# Altium PCB test_board.PcbDoc
Units mm, origin at the board's own origin, x right, y up, seen from the top; angles counter-clockwise.
Board outline 152.4 x 101.6 mm, 2 copper layers (Top Layer, Bottom Layer); 82 components, 69 nets, 361 pads, 23 vias.
Unrouted connection lines stored in the file: 183.
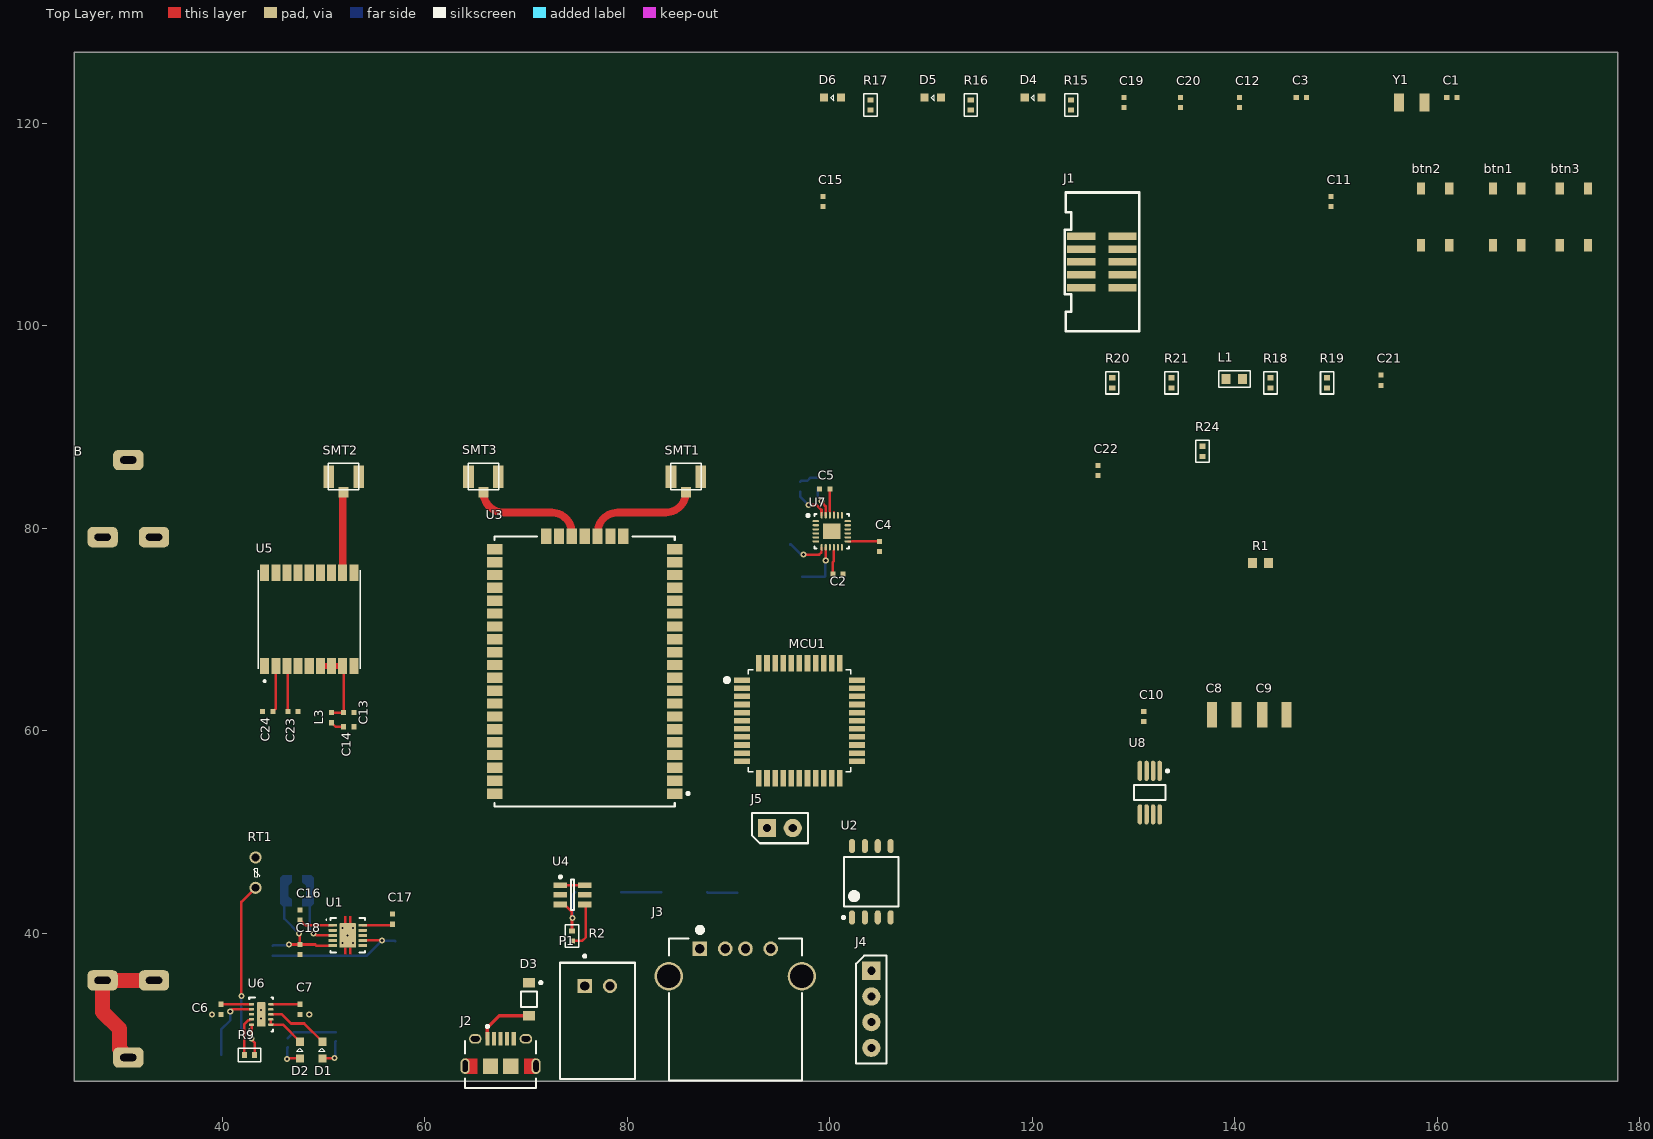
[diagram p0: Top Layer view]
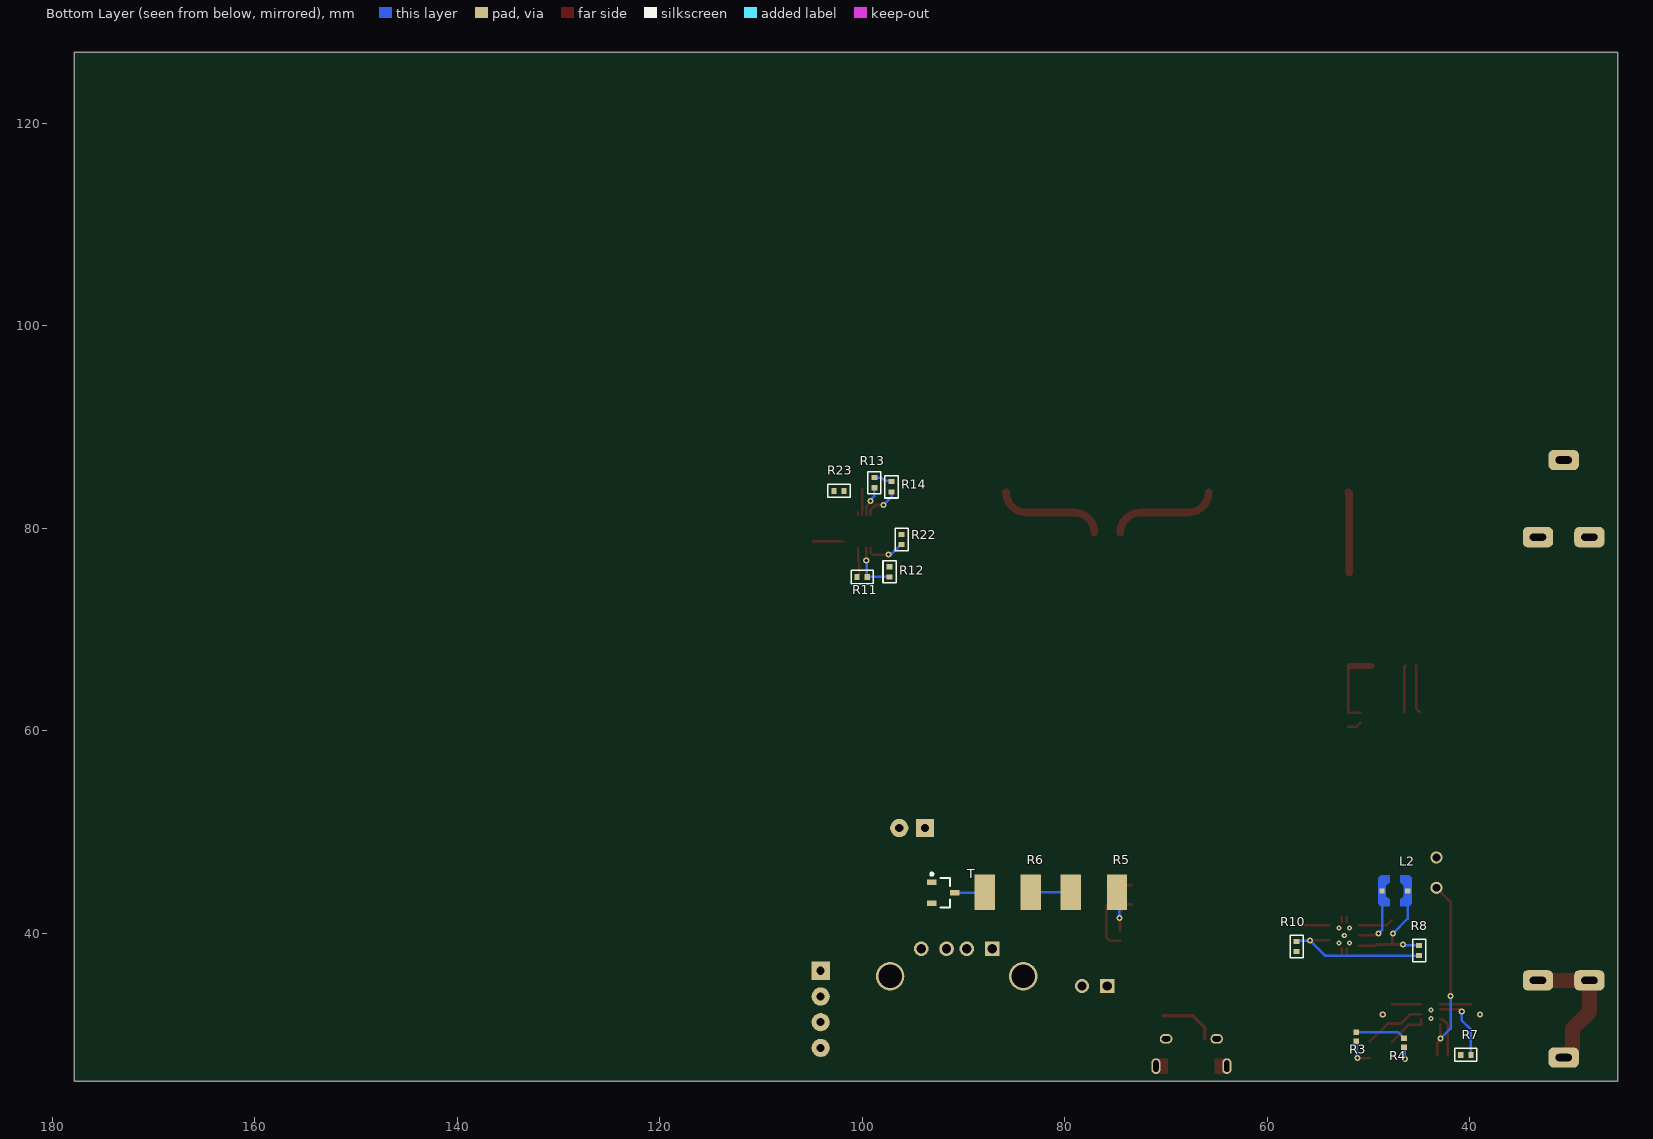
[diagram p1: Bottom Layer view, seen from below]

## Layer stack, top to bottom
Top Solder: solder mask 0.0102, Solder Resist, Dk 3.5
Top Layer: signal copper 0.0356
Dielectric 1: dielectric 0.32, FR-4, Dk 4.8
Bottom Layer: signal copper 0.0356
Bottom Solder: solder mask 0.0102, Solder Resist, Dk 3.5

## Board outline
25.4,25.4 177.8,25.4 177.8,127 25.4,127

## Design rules (kind name [scope] priority, off if disabled: settings)
Clearance [All] p1: gap=0.16 ignorepadtopadclearanceinfootprint=FALSE except(0: Arc-Text Arc-Hole Track-Text Track-Hole SMDPad-Text SMDPad-Hole THPad-Text THPad-Hole Via-Text Via-Hole Fill-Text Fill-Hole Poly-Text Poly-Hole Region-Text Region-Hole Text-Text)
ComponentClearance [All] p1: gap=0.254 collisioncheckmode=3 verticalgap=0.254 showdistances=TRUE
DiffPairsRouting [All] p1: maxlimit=0.254 minlimit=0.254 mostfreqgap=0.254 toplayer_minwidth=0.16 toplayer_maxwidth=0.381 toplayer_prefwidth=0.2 bottomlayer_minwidth=0.16 bottomlayer_maxwidth=0.381 bottomlayer_prefwidth=0.2 maxuncoupledlength=0.2
Height [All] p1: minheight=0 maxheight=200 prefheight=200
HoleSize [All] p1: absolutevalues=TRUE maxlimit=6.35 minlimit=0.3 maxpercent=80.000 minpercent=20.000
LayerPairs [All] p1: enforce=FALSE
MinimumSolderMaskSliver [All] p1: minsoldermaskwidth=0
PlaneConnect [All] p1: planeconnectstyle=Relief reliefexpansion=0.508 reliefentries=4 reliefconductorwidth=1 reliefairgap=0.254
PolygonConnect PolygonConnect_1 [IsVia] p1: connectstyle=Direct reliefconductorwidth=0.254 reliefentries=4 polygonreliefangle="90 Angle" airgapwidth=0.254
PolygonConnect [All] p2: connectstyle=Relief reliefconductorwidth=0.2 reliefentries=4 polygonreliefangle="90 Angle" airgapwidth=0.254
RoutingVias [All] p1: holewidth=0.3 width=0.6 viastyle="Through Hole" minholewidth=0.3 minwidth=0.6 maxholewidth=6.35 maxwidth=1.27
SilkToSilkClearance [All] p1: silktosilkclearance=0
SilkToSolderMaskClearance [IsPad] p1: minsilkscreentomaskgap=0.178 clearancetoexposedcopper=TRUE
SolderMaskExpansion [All] p1: expansion=0.102 istentingtop=FALSE
Width [All] p1: maxlimit=5 minlimit=0.16 preferedwidth=0.25 minimp=50.000000 maximp=50.000000 favimp=50.000000
21 further rules are at their usual default settings.

## Components (designator, comment, footprint, x,y, rotation, side; value= is the part's Value field where it differs from the comment)
B "18650" 18650 30.734,27.741 r90 top
btn1 "KSC222G LFS" "KSC222G LFS" 166.878,110.744 r0 top
btn2 "KSC222G LFS" "KSC222G LFS" 159.766,110.744 r0 top
btn3 "KSC222G LFS" "KSC222G LFS" 173.482,110.744 r0 top
C1 "04023C103KAT2A" C0402 161.417,122.555 r0 top value=22pF
C2 "04023C103KAT2A" C0402 100.8,75.5 r180 top value=0.1uF
C3 "04023C103KAT2A" C0402 146.558,122.555 r0 top value=22pF
C4 "04023C103KAT2A" C0402 104.9,78.2 r90 top value=0.1uF
C5 "04023C103KAT2A" C0402 99.5,83.9 r0 top value=0.1uF
C6 "04023C103KAT2A" C0402 39.9,32.5 r270 top value=1uF
C7 "04023C103KAT2A" C0402 47.7,32.5 r270 top value=1uF
C8 "TCJB106M016R0100" C3528 138.948,61.572 r0 top value=10uF
C9 "TCJB106M016R0100" C3528 143.901,61.572 r0 top value=10uF
C10 "04023C103KAT2A" C0402 131,61.4 r90 top value=1uF
C11 "04023C103KAT2A" C0402 149.479,112.268 r90 top value=100nF
C12 "04023C103KAT2A" C0402 140.462,122.047 r90 top value=100nF
C13 "04023C103KAT2A" C0402 52.5,61.8 r180 top value="56 pF"
C14 "04023C103KAT2A" C0402 52.5,60.4 r180 top value="10 nF"
C15 "04023C103KAT2A" C0402 99.314,112.268 r90 top value=1uF
C16 "04023C103KAT2A" C0402 47.7,41.8 r270 top value="0.47 uF"
C17 "04023C103KAT2A" C0402 56.8,41.4 r90 top value=4
C18 "04023C103KAT2A" C0402 47.7,38.4 r270 top value="0.47 uF"
C19 "04023C103KAT2A" C0402 129.032,122.047 r90 top value=0.1uF
C20 "04023C103KAT2A" C0402 134.62,122.047 r90 top value=0.1uF
C21 "04023C103KAT2A" C0402 154.432,94.615 r90 top value=100nF
C22 "04023C103KAT2A" C0402 126.5,85.7 r90 top value=100nF
C23 "04023C103KAT2A" C0402 47,61.9 r0 top value="56 pF"
C24 "04023C103KAT2A" C0402 44.5,61.9 r0 top value="56 pF"
D1 "Green LED" "LED 0603" 49.9,29.3 r270 top
D2 "Green LED" "LED 0603" 47.7,29.3 r270 top
D3 "MBR0520L" ONSC-SOD-123-2-425-04_V 70.3,33.5 r270 top
D4 "Green LED" "LED 0603" 119.253,122.555 r0 top
D5 "Green LED" "LED 0603" 109.347,122.555 r0 top
D6 "Green LED" "LED 0603" 99.441,122.555 r0 top
J1 "SHF-105-01-L-D-SM" "JTAG HEADER" 126.873,106.299 r90 top
J2 "10118194-0001LF" FCI-10118194-0001LF-5_V 67.492,28.241 r0 top
J3 "292303-1" TE-292303-1_V 90.673,37.338 r0 top
J4 "ADC 4-7" HDRV4W64P254_1X4_1016X254X900B 104.1,32.5 r0 top
J5 "Header 1x2" HDRV2W64P254_1X2_508X254X900B 96.34,50.4 r90 top
L1 "MLZ1608A2R2WT" "Inductor 0603" 139.954,94.742 r0 top value=10uH
L2 "LPS3015-222MRB" COIL-LPS3015_V 47.4,44.2 r0 bottom
L3 "LQG15HN27NJ02D" "INDUCTOR 0402" 50.8,61.3 r270 top value="27 nH"
MCU1 "ATMEGA324PB-AU" *QFP80P1200X1200X120-44N 97,61 r0 top
P1 "S2B-XH-A(LF)(SN)" JST-S2B-XH-A(LF)(SN)_V 77.05,34.8 r0 top
R1 "10k" RESC0603(1608)_N 142.532,76.581 r0 top
R2 "CRCW04020000Z0ED" R0402 74.544,39.751 r270 top value="0.13 ohm"
R3 "2k" RESC0402(1005)_L 51.2,29.8 r90 bottom
R4 "2k" RESC0402(1005)_L 46.5,29.2 r90 bottom
R5 "35228R2JT" R6432 77.1,44 r0 bottom value=8.2ohm
R6 "35228R2JT" R6432 85.6,44 r0 bottom value=8.2ohm
R7 "CRCW04020000Z0ED" R0402 40.4,28 r0 bottom value=1.18kOhm
R8 "CRCW04020000Z0ED" R0402 45,38.3 r270 bottom value=2.26Mohm
R9 "CRCW04020000Z0ED" R0402 42.7,28 r0 top value=17.4kohm
R10 "CRCW04020000Z0ED" R0402 57.1,38.7 r270 bottom value=249kohm
R11 "CRCW04020000Z0ED" R0402 100,75.2 r180 bottom value=165kohm
R12 "CRCW04020000Z0ED" R0402 97.3,75.7 r90 bottom value=200kohm
R13 "CRCW04020000Z0ED" R0402 98.8,84.5 r270 bottom value=10kohm
R14 "CRCW04020000Z0ED" R0402 97.1,84.1 r270 bottom value=10kohm
R15 "CRCW04020000Z0ED" R0402 123.825,121.793 r90 top value=300
R16 "CRCW04020000Z0ED" R0402 113.919,121.793 r90 top value=300
R17 "CRCW04020000Z0ED" R0402 104.013,121.793 r90 top value=300
R18 "CRCW04020000Z0ED" R0402 143.51,94.361 r90 top value="? kohm"
R19 "CRCW04020000Z0ED" R0402 149.098,94.361 r90 top value=41.2kohm
R20 "CRCW04020000Z0ED" R0402 127.889,94.361 r90 top value="? kohm"
R21 "CRCW04020000Z0ED" R0402 133.731,94.361 r90 top value=150kohm
R22 "CRCW04020000Z0ED" R0402 96.1,78.9 r90 bottom value=10kohm
R23 "CRCW04020000Z0ED" R0402 102.3,83.7 r0 bottom value=10kohm
R24 "CRCW04020000Z0ED" R0402 136.8,87.6 r90 top value=10kohm
RT1 "B57164K0103J000" B57164K0103J000 43.3,46 r90 top
SMT1 "U.FL-R-SMT" *U.FL-R-SMT_U.FL-R-SMT(Primary) 85.8,85.1 r0 top
SMT2 "U.FL-R-SMT" *U.FL-R-SMT_U.FL-R-SMT(Primary) 52,85.1 r0 top
SMT3 "U.FL-R-SMT" *U.FL-R-SMT_U.FL-R-SMT(Primary) 65.8,85.1 r0 top
T "DMG6968U" DMG6968U 92,44 r180 bottom
U1 "TPS61201DRCT" DRC0010J_V 52.4,39.8 r0 top
U2 "SST25VF080B-50-4I-S2AF" MCHP-SOIC-S2A8_L 104.1,45.1 r90 top
U3 "RN2483A-I/RM103" MCHP-MODULE-47_V 75.8,66.5 r180 top
U4 "MAX44284FAUT+T" MAXM-U6_V 74.6,43.8 r0 top
U5 "TESEO-LIV3F" *TESEO-LIV3F 48.6,71 r180 top
U6 "BQ24210DQCT" DQC0010A 43.85,32 r0 top
U7 "ICM-20948" TDK-QFN-24_L 100.2,79.7 r0 top
U8 "MCP1253T-33X50I/MS" MSOP-MS8_M 131.6,53.9 r270 top
Y1 "9HT10-32.768KEZC-T" 9HT10-32.768KEZC-T 156.21,122.047 r0 top

## Footprints (in the part's own frame and the unit in brackets; to place one, negate y for a bottom-side part, rotate by r counter-clockwise, add the part's x,y. Pads: shape width x height; smd on the part's side, far side on the other; paste and mask are expansions set on the pad)
9HT10-32.768KEZC-T [mm]
  rect 1x1.8 smd: 1(0,0) 2(2.5,0)
18650 [mm] "18650 battery holder"
  rrect50% 2x3 hole 1.6 slot 0.7 at 0 deg: 1(0,0) 1(7.62,-2.54) 1(7.62,2.54) 2(51.38,-2.54) 2(51.38,2.54) 2(59,0)
*QFP80P1200X1200X120-44N [mm]
  rect 1.6x0.55 smd: 1(-5.68,4) 2(-5.68,3.2) 3(-5.68,2.4) 4(-5.68,1.6) 5(-5.68,0.8) 6(-5.68,0) 7(-5.68,-0.8) 8(-5.68,-1.6) 9(-5.68,-2.4) 10(-5.68,-3.2) 11(-5.68,-4) 23(5.68,-4) 24(5.68,-3.2) 25(5.68,-2.4) 26(5.68,-1.6) 27(5.68,-0.8) 28(5.68,0) 29(5.68,0.8) 30(5.68,1.6) 31(5.68,2.4) 32(5.68,3.2) 33(5.68,4)
  rect 0.55x1.6 smd: 12(-4,-5.68) 13(-3.2,-5.68) 14(-2.4,-5.68) 15(-1.6,-5.68) 16(-0.8,-5.68) 17(0,-5.68) 18(0.8,-5.68) 19(1.6,-5.68) 20(2.4,-5.68) 21(3.2,-5.68) 22(4,-5.68) 34(4,5.68) 35(3.2,5.68) 36(2.4,5.68) 37(1.6,5.68) 38(0.8,5.68) 39(0,5.68) 40(-0.8,5.68) 41(-1.6,5.68) 42(-2.4,5.68) 43(-3.2,5.68) 44(-4,5.68)
  silkscreen extent -7.36,-5.05 5.05,5.05
*TESEO-LIV3F [mm]
  rect 0.9x1.6 smd: 1(4.4,4.6) 2(3.3,4.6) 3(2.2,4.6) 4(1.1,4.6) 5(0,4.6) 6(-1.1,4.6) 7(-2.2,4.6) 8(-3.3,4.6) 9(-4.4,4.6) 10(-4.4,-4.6) 11(-3.3,-4.6) 12(-2.2,-4.6) 13(-1.1,-4.6) 14(0,-4.6) 15(1.1,-4.6) 16(2.2,-4.6) 17(3.3,-4.6) 18(4.4,-4.6)
  silkscreen extent -5.05,-4.85 5.05,6.2
*U.FL-R-SMT_U.FL-R-SMT(Primary) [mm]
  rect 1x1.05 smd: P$1(0,-1.525)
  rect 1.05x2.2 smd: P$2(1.475,0) P$3(-1.475,0)
  silkscreen extent -1.5,-1.3 1.5,1.3
B57164K0103J000 [mm] "Thermistor, through hole, R25=10kohm"
  round 1.2 hole 0.762: 1(1.5,0) 2(-1.5,0)
  silkscreen extent -0.43,-0.41 0.42,0.23
C0402 [mm]
  rect 0.5x0.5 smd: 1(-0.5,0) 2(0.5,0)
  body extent -0.5,-0.25 0.5,0.25, height 0.5
C3528 [mm] "Low ESR (0.1ohm), 10uF"
  rect 1x2.5 smd: 1(-1.2,0) 2(1.2,0)
  body extent -1.6,-0.8 1.6,0.8, height 1.25
COIL-LPS3015_V [mm] "SMD, 2-Leads, Body 2.95x2.95mm"
  rect 0.5x0.5 smd mask+0.1: 1(-1.27,0) 2(1.27,0)
  Top Layer region: -0.51,1.525 -1.395,1.525 -1.395,1.525 -1.65,1.27 -1.65,-1.27 -1.395,-1.525 -0.51,-1.525 -0.51,-0.825 -0.89,-0.51 -0.89,-0.51 -0.89,0.51 -0.51,0.825 -0.51,0.825
  Top Layer region: 0.51,1.525 1.395,1.525 1.395,1.525 1.65,1.27 1.65,-1.27 1.395,-1.525 0.51,-1.525 0.51,-0.825 0.89,-0.51 0.89,-0.51 0.89,0.51 0.51,0.825 0.51,0.825
  body extent -1.58,-1.58 1.58,1.58, height 1.5
DMG6968U [mm] "SOT23, 3-Leads, Body 2.85x2.35mm, Pitch 1.03mm, IPC Medium Density"
  rect 0.95x0.55 smd: 1(-1.125,1.03) 2(-1.125,-1.03) 3(1.125,0)
  silkscreen extent -1.25,-1.45 0.65,1.98, body extent -1.2,-1.45 1.2,1.45, height 1.02
DQC0010A [mm] "SON, 10-Leads, Body 2x3mm, Pitch 0.5mm, Thermal Pad 2.4x0.84mm"
  rrect40% 0.5x0.25 smd: 1(-0.95,1) 2(-0.95,0.5) 3(-0.95,0) 4(-0.95,-0.5) 5(-0.95,-1) 6(0.95,-1) 7(0.95,-0.5) 8(0.95,0) 9(0.95,0.5) 10(0.95,1)
  rrect12% 0.84x2.4 smd paste-0.42: 11(0,0)
  silkscreen extent -1.17,-1.68 1.17,1.67, body extent -1.05,-1.55 1.05,1.55, height 0.81
DRC0010J_V [mm] "SON, 10-Leads, Body 3x3mm, Pitch 0.5mm, Thermal Pad 2.4x1.65mm, TI Recommended"
  rrect36% 0.85x0.28 smd paste-0.025 mask+0.07: 1(-1.475,1) 2(-1.475,0.5) 3(-1.475,0) 4(-1.475,-0.5) 5(-1.475,-1) 6(1.475,-1) 7(1.475,-0.5) 8(1.475,0) 9(1.475,0.5) 10(1.475,1)
  rrect6% 1.65x2.4 smd paste-0.825 mask+0.07: 11(0,0)
  Top Layer region: -0.39,1.2 -0.11,1.2 -0.11,1.9 -0.39,1.9
  Top Layer region: 0.39,1.9 0.11,1.9 0.11,1.2 0.39,1.2
  Top Layer region: 0.39,-1.2 0.11,-1.2 0.11,-1.9 0.39,-1.9
  Top Layer region: -0.39,-1.9 -0.11,-1.9 -0.11,-1.2 -0.39,-1.2
  silkscreen extent -2.15,-1.7 1.7,1.7, body extent -1.55,-1.55 1.55,1.55, height 1
FCI-10118194-0001LF-5_V [mm] "SMD, 5-Leads, Body 7x5mm, Pitch 0.65 mm"
  rect 0.4x1.35 smd: 1(-1.3,1.35) 2(-0.65,1.35) 3(0,1.35) 4(0.65,1.35) 5(1.3,1.35)
  oval 1.25x0.95 hole 0.55 slot 0.85 at 0 deg: 6(-2.5,1.35) 7(2.5,1.35)
  oval 0.9x1.55 hole 0.5 slot 1.15 at 90 deg: 8(-3.5,-1.35) 9(3.5,-1.35)
  rect 1.5x1.55 smd: 10(-1,-1.35) 11(1,-1.35)
  Top Layer region: 3.5,-2.125 3.5,-0.575 2.3,-0.575 2.3,-2.125
  Top Layer region: -2.3,-2.125 -2.3,-0.575 -3.5,-0.575 -3.5,-2.125
  silkscreen extent -3.5,-3.5 3.5,2.7, body extent -4.02,-4.03 4.02,1.55, height 2.72
HDRV2W64P254_1X2_508X254X900B [mm] "Header 1x2"
  rect 1.8x1.8 hole 0.8: 1(0,2.54)
  round 1.8 hole 0.8: 2(0,0)
  silkscreen extent -1.5,-1.5 1.5,4.04
HDRV4W64P254_1X4_1016X254X900B [mm] "Header 1x4"
  rect 1.8x1.8 hole 0.8: 1(0,3.81)
  round 1.8 hole 0.8: 2(0,1.27) 3(0,-1.27) 4(0,-3.81)
  silkscreen extent -1.5,-5.37 1.5,5.31
"INDUCTOR 0402" [mm]
  rect 0.5x0.5 smd: 1(-0.5,0) 2(0.5,0)
  body extent -0.5,-0.25 0.5,0.25, height 0.5
"Inductor 0603" [mm]
  rect 0.88x0.99 smd: 1(-0.815,0) 2(0.815,0)
  silkscreen extent -1.55,-0.8 1.55,0.8, body extent -0.87,-0.48 0.87,0.48, height 0.91
JST-S2B-XH-A(LF)(SN)_V [mm] "Header, 2-Leads, Body 7.4x11.5mm, Pitch 2.5mm"
  rect 1.4x1.4 hole 0.9: 1(-1.25,0)
  round 1.4 hole 0.9: 2(1.25,0)
  silkscreen extent -3.7,-9.2 3.7,3.08, body extent -3.7,-9.2 3.7,2.3, height 6.1
"JTAG HEADER" [mil] "10-pin, 1.27 mm"
  rect 29x110 smd mask+2: 1(-100,-80) 2(-100,80) 3(-50,-80) 4(-50,80) 5(0,-80) 6(0,80) 7(50,-80) 8(50,80) 9(100,-80) 10(100,80)
  silkscreen extent -270,-145 270,145
"KSC222G LFS" [mm]
  rect 0.8x1.2 smd: 1(-1.4,2.794) 2(-1.4,-2.794) 3(1.4,2.794) 4(1.4,-2.794)
  body extent -2.29,-3.06 2.29,3.05, height 1.5
"LED 0603" [mm] "1.6mmX0.8mm SMD, 2mA"
  rect 0.8x0.8 smd: 1(1.65,0) 2(0,0)
  silkscreen extent 0.65,-0.35 0.95,0.25
MAXM-U6_V [mm] "SOT23, 6-Leads, Body 3x1.75mm, Pitch 0.95mm"
  rect 1.33x0.56 smd: 1(-1.2,0.95) 2(-1.2,0) 3(-1.2,-0.95) 4(1.2,-0.95) 5(1.2,0) 6(1.2,0.95)
  silkscreen extent -1.32,-1.5 0.15,1.9, body extent -1.5,-1.5 1.5,1.5, height 1.45
MCHP-MODULE-47_V [mil] "SMD, 47-Leads, Body 26.67x17.78mm, Pitch 1.27mm"
  rect 60x40 smd mask+3.94: 1(-350,500) 2(-350,450) 3(-350,400) 4(-350,350) 5(-350,300) 6(-350,250) 7(-350,200) 8(-350,150) 9(-350,100) 10(-350,50) 11(-350,0) 12(-350,-50) 13(-350,-100) 14(-350,-150) 15(-350,-200) 16(-350,-250) 17(-350,-300) 18(-350,-350) 19(-350,-400) 20(-350,-450) 28(350,-450) 29(350,-400) 30(350,-350) 31(350,-300) 32(350,-250) 33(350,-200) 34(350,-150) 35(350,-100) 36(350,-50) 37(350,0) 38(350,50) 39(350,100) 40(350,150) 41(350,200) 42(350,250) 43(350,300) 44(350,350) 45(350,400) 46(350,450) 47(350,500)
  rect 40x60 smd mask+3.94: 21(-150,-500) 22(-100,-500) 23(-50,-500) 24(0,-500) 25(50,-500) 26(100,-500) 27(150,-500)
  silkscreen extent -407,-500 350,550, body extent -350,-500 350,550, height 131
MCHP-SOIC-S2A8_L [mm] "SOIC, 8-Leads, Body 5.275x5.275mm, Pitch 1.27mm, IPC High Density"
  oval 1.4x0.6 smd: 1(-3.525,1.905) 2(-3.525,0.635) 3(-3.525,-0.635) 4(-3.525,-1.905) 5(3.525,-1.905) 6(3.525,-0.635) 7(3.525,0.635) 8(3.525,1.905)
  silkscreen extent -3.65,-2.7 2.43,2.88, body extent -2.7,-2.7 2.7,2.7, height 2.16
MSOP-MS8_M [mm] "TSOP, 8-Leads, Body 3x3mm, Pitch 0.65mm, IPC Low Density"
  oval 2x0.45 smd: 1(-2.15,0.975) 2(-2.15,0.325) 3(-2.15,-0.325) 4(-2.15,-0.975) 5(2.15,-0.975) 6(2.15,-0.325) 7(2.15,0.325) 8(2.15,0.975)
  silkscreen extent -2.27,-1.55 0.75,1.88, body extent -1.55,-1.55 1.55,1.55, height 1.1
ONSC-SOD-123-2-425-04_V [mm] "SOD, 2-Leads, Body 2.69x1.6mm"
  rect 0.91x1.22 smd: 1(-1.635,0) 2(1.635,0)
  silkscreen extent -1.76,-0.8 0.78,1.29, body extent -1.35,-0.8 1.35,0.8, height 1.35
R0402 [mm]
  rect 0.5x0.6 smd: 1(-0.5,0) 2(0.5,0)
  silkscreen extent -1.1,-0.65 1.11,0.64, body extent -0.5,-0.25 0.5,0.25, height 0.35
R6432 [mm] "3W resistor SMD"
  rect 2x3.5 smd: 1(-2.25,-0.05) 2(2.3,-0.05)
RESC0402(1005)_L [mm] "Chip Resistor, 2-Leads, Body 1,00x0,50mm, IPC Medium Density"
  rect 0.55x0.55 smd: 1(-0.45,0) 2(0.45,0)
  body extent -0.53,-0.27 0.53,0.28, height 0.37
RESC0603(1608)_N [mm] "Chip Resistor, Body 1.6x0.8mm, IPC Medium Density"
  rect 0.9x1 smd: 1(-0.8,0) 2(0.8,0)
  body extent -0.85,-0.47 0.85,0.47, height 0.6
TDK-QFN-24_L [mm] "QFN, 24-Leads, Body 3.10x3.10mm, Pitch 0.40mm, Thermal Pad 1.70x1.54mm, IPC High Density"
  oval 0.65x0.2 smd: 1(-1.575,1) 2(-1.575,0.6) 3(-1.575,0.2) 4(-1.575,-0.2) 5(-1.575,-0.6) 6(-1.575,-1) 13(1.575,-1) 14(1.575,-0.6) 15(1.575,-0.2) 16(1.575,0.2) 17(1.575,0.6) 18(1.575,1)
  oval 0.2x0.65 smd: 7(-1,-1.575) 8(-0.6,-1.575) 9(-0.2,-1.575) 10(0.2,-1.575) 11(0.6,-1.575) 12(1,-1.575) 19(1,1.575) 20(0.6,1.575) 21(0.2,1.575) 22(-0.2,1.575) 23(-0.6,1.575) 24(-1,1.575)
  rect 1.7x1.54 smd: 25(0,0)
  silkscreen extent -2.47,-1.7 1.7,1.7, body extent -1.55,-1.55 1.55,1.55, height 1.05
TE-292303-1_V [mm] "THD, 4-Leads, Body 13.13x14mm, Pitch 2.5mm"
  rect 1.45x1.45 hole 0.92: 1(-3.5,1.144)
  round 1.45 hole 0.92: 2(-1,1.144) 3(1,1.144) 4(3.5,1.144)
  round 2.8 hole 2.3: 5(-6.57,-1.566) 6(6.57,-1.566)
  silkscreen extent -6.57,-11.85 6.57,3.25, body extent -8.12,-11.85 8.12,2.15, height 7.72

## Part data
btn1 btn2 btn3: "Button SMD"
  btn1: Type=SW1
  btn2: Type=SW2
  btn3: Type=RST
C1 C2 C3 C4 C5 C6 C7 C10 C11 C12 C13 C14 C15 C16 C17 C18 C19 C20 C21 C22 C23 C24: "C0402"
C8 C9: "C3528, low ESR (0.1ohm)"
D1 D2 D4 D5 D6: "LED, green, 0603, 2mA, 2.65V, SMD"
D3: library part CMP-2000-04926-1, "Schottky Diode, 20V, 0.2A, 2-pin SOD-123, RoHS, Tape and Reel", Manufacturer=FairchildSemiconductor, Operating Temperature=-65to125degC, Package=2SOD-123, Package Description="2-Pin Small Outline Diode, Body 2.69 x 1.6 mm", Package Reference=SOD-123-2-425-04, Peak Average Forward Current=0.5A, Peak Forward Voltage=0.385V, Peak Non-Repetitive Surge Current=5.5A, Peak Reverse Current=250uA, Peak Reverse Repetitive Voltage=20V, Category=Rectifier, Configuration=Single, Datasheet URL=https://datasheet.ciiva.com/5739/1684450-5739282.pdf, Datasheet Version="Rev. C0, 03/2012", Manufacturer URL=https://www.fairchildsemi.com/, Mounting=SurfaceMount, Packaging=Tape&Reel, Rad Hard=No, Type=SchottkyDiode
J1: "JTAG, 10 pin, 1.27mm", Type=JTAG
J2: library part CMP-2000-05120-1, "Micro USB B Type Receptacle, 1.8 A, -55 to 85 degC, 5-Pin SMD, RoHS, Tape and Reel", Manufacturer="Amphenol FCI", Package Description="5-Pin Surface Mount Device, Body 8.05 x 5.53 mm, Pitch 0.65 mm", Package Reference=10118194-0001LF-5, Body Orientation=RightAngle, Datasheet URL=https://datasheet.ciiva.com/26945/getdatasheetpartid-418619-26945695.pdf, Datasheet Version="Rev. A, 10/2011", Gender=RCP, Manufacturer URL=http://www.fci.com/, Mounting=SurfaceMount, Number of Contacts=5, Packaging=CutTape, Pitch=0.65mm, Rad Hard=No, Termination Method=Solder, Type=MicroUSBTypeB
J3: library part CMP-2000-05404-1, "1 Port Right Angle Through Hole Mount Female Type A USB Connector, 4 Position, -55 to 85 degC, RoHS, Tube", Manufacturer="TE Connectivity", Package Description="4-Pin Through Hole Device, Body 14 x 13.13 mm, Pitch 2.5 mm", Connector Mounting=PCB, Connector Type=USBA, Contact Material=Copper, Contact Plating=Gold, Contact Termination Type=Solder, Datasheet URL=http://www.farnell.com/cad/1653030.pdf, Datasheet Version=Feb-12, Gender=Receptacle, Manufacturer URL=http://www.te.com/, No. of Contacts=4, Package Reference=292303-1, SVHC=NoSVHC(16-Jun-2014)
J4: library part 5096, beskrivelse="2,54mm pitch", id=5096, komponenttype=11, navn="Header 1x4", pakke_opprettet="13.11.2014 12:31:18", pakke_opprettet_av=815, pakketype=TH, pris=2, symbol_opprettet="13.11.2014 10:59:12", symbol_opprettet_av=815
J5: library part 5094, beskrivelse="2,54mm pitch", id=5094, komponenttype=11, navn="Header 1x2", pakke_opprettet="13.11.2014 12:30:48", pakke_opprettet_av=815, pakketype=TH, pris=1, symbol_opprettet="13.11.2014 10:58:53", symbol_opprettet_av=815
L1: "Inductor 0603"
L2: library part CMP-2000-06574-1, "Shielded Power Inductor, 2.2 uH, +/- 20%, 110 mOhm, -40 to 85 degC, 2-Pin SMD, RoHS, Tape and Reel", Inductance=2.2uH, Manufacturer=Coilcraft, Maximum DC Current=2.1A, Maximum DC Resistance=110mOhms, Operating Temperature Range=-40Cto+85C, Package Description="2-Pin Surfave Mount Device, Body 2.95 x 2.95 mm", Package Reference=LPS3015, Self Resonant Frequency=110MHz, Test Frequency=100kHz, Tolerance=20%, =LPS3015-222MRC, Brand=Coilcraft, Core Material=Ferrite, Datasheet URL=http://www.coilcraft.com/pdfs/lps3015.pdf, Datasheet Version=09/2015, Factory Pack Quantity=1, Height=1.4mm, Length=3mm, Manufacturer URL=http://www.coilcraft.com/, Mounting Style=SMD/SMT, Mounting Technology=SurfaceMount, Packaging=CutTape, Product=PowerInductors, Product Category=FixedInductors, Qualification=AEC-Q200, RoHS=True, Series=LPS3015, Shielding=Shielded, Termination Style=SMD/SMT, Type=ShieldedPowerInductor, Unit Weight=0.001411oz, Width=3mm
L3: "Inductor 0402"
MCU1: "Avr, 32kb Flash, 1kb Ee, 2kb Ram - 20mhz, Tqfp, Ind Temp, Green 5 v/ Tqfp _a_", Package="TQFP-44 Microchip", Availability=Unavailable, MF=Microchip, MP=ATMEGA324PB-AU, Price=None, SnapEDA_Link=https://www.snapeda.com/parts/ATMEGA324PB-AU/Microchip/view-part/?ref=snap
P1: library part CMP-1755-00005-1, "Male Header, Pitch 2.5 mm, 1 x 2 Position, Height 6.1 mm, Tail Length 3.4 mm, -25 to 85 degC, RoHS, Bulk", Capacitance="1 nF", Case\Package=Radial, Max Operating Temperature="125 degC", Min Operating Temperature="-55 degC", Package Quantity=500, Tolerance=10%, Type (Capacitors)=X7R, Voltage Rating="100 V", ComponentLink1Description="Manufacturer URL", ComponentLink1URL=http://www.jst.com/home2.html, ComponentLink2Description=Datasheet, ComponentLink2URL=http://www.jst-mfg.com/product/pdf/eng/eXH.pdf, DatasheetVersion=May-16, Height="2.54 mm", Lead Pitch="2.54 mm", Length="5.33 mm", Mount="Through Hole", PackageDescription="Male Header, Pitch 2.5 mm, 1 x 2 Position, Height 6.1 mm, Tail Length 3.4 mm", PackageReference=S2B-XH-A(LF)(SN), Packaging=Bulk, Pins=2, Radiation Hardening=No, REACH SVHC="No SVHC", RoHSCompliant=true, Voltage Rating (DC)="100 V", Width="3.81 mm"
R1: library part 5264, "0.1W 1% Thick film resistor", antall=1200, dybde=3, hylle=6, id=5264, komponenttype=1, lager_type=Baklager, leverandor=Farnell, leverandor_varenr=2447230, navn=10k, nokkelord="Resistor Motstand", pakke_opprettet="08.07.2014 21:15:30", pakke_opprettet_av=815, pakketype=0603, pris=0, produsent=Multikomp, rad=1, rom=OV, symbol_opprettet="08.07.2014 21:16:33", symbol_opprettet_av=815
R2 R7 R8 R9 R10 R11 R12 R13 R14 R15 R16 R17 R18 R19 R20 R21 R22 R23 R24: "R0402"
R3 R4: library part 5677, "0.1W 1% Thick film resistor", id=5677, komponenttype=1, navn=56k, pakke_opprettet="12.05.2019 22:25:28", pakke_opprettet_av=1855, pakketype=0402, pris=0, symbol_opprettet="08.07.2014 21:16:33", symbol_opprettet_av=815
R5 R6: "R6432, 3W"
RT1: "Thermistor, through hole"
SMT1 SMT2 SMT3: Package=None, Availability=Unavailable, MF="Hirose Electric", MP=U.FL-R-SMT, Price=None, SnapEDA_Link=https://www.snapeda.com/parts/U.FL-R-SMT/Hirose%20Electric%20Co%20Ltd/view-part/?ref=snap
T: "NMOS 6.5A 500mV", Cont. drain current=6.5A, Supplier Part Number 1=1843757, Threshold voltage=500mV, Supplier 1=Farnell
U1: library part CMP-0343-00033-2, "Boost Voltage Converter with 0.3 to 5.5 V Input and 3.3 V Output, -40 to 85 degC, 10-Pin SON (DRC), Green (RoHS & no Sb/Br)", Manufacturer="Texas Instruments", Switching Frequency(Max)(kHz)=1250, ComponentLink1Description=Datasheet, ComponentLink1URL=http://www.ti.com/general/docs/lit/getliterature.tsp?genericPartNumber=TPS61201&fileType=pdf, ComponentLink2Description="Package Specification", ComponentLink2URL=http://www.ti.com/litv/pdf/mpds117k, DatasheetVersion=SLVS577B, Eco-Plan="Green (RoHS & no Sb/Br)", Mounting Technology="Surface Mount", PackageDescription="10-Pin Plastic Small Outline No-Lead, 3 x 3 x 1 mm Body, 0.5 mm Pitch, Exposed Pad", PackageReference=DRC0010J, PackageVersion="revL, Sep-2011", PartNumber=TPS61201DRCT, Preset Vout(V)=3.3, Regulated Outputs(#)=1, SubFamily="Step-Up Regulator", Synchronous Rectification=TRUE, Topology=Boost, Vin(Max)(V)=5.5, Vin(Min)(V)=0.3, Vout(Max)(V)=3.3, Vout(Min)(V)=3.3
U2: library part CMP-0378-00062-1, "8 Mbit SPI Serial Flash, 2.7 to 3.6 V, 50 MHz, -40 to 85 degC, 8-pin SOIC (S2A8), Tube", Manufacturer=Microchip, ComponentLink1Description="Manufacturer URL", ComponentLink1URL=http://www.microchip.com, ComponentLink2Description=Datasheet, ComponentLink2URL=http://ww1.microchip.com/downloads/en/DeviceDoc/25045A.pdf, ComponentLink3Description="Package Specification", ComponentLink3URL=http://ww1.microchip.com/downloads/en/DeviceDoc/25051A.pdf, ComponentLink4Description="Product URL", ComponentLink4URL=http://www.microchip.com/SST25VF080B, DatasheetVersion="Rev. A", Mounting Technology="Surface Mount", PackageDescription="8-Lead Plastic Small Outline Intergrated Circuit, 5.275 x 5.275 mm Body, 1.27 mm Pitch", PackageReference=SOIC-S2A8, PackageVersion="Rev. A", PartNumber=SST25VF080B-50-4I-S2AF, Type=FLASH
U3: library part CMP-2000-07478-1, "Low-Power Long Range LoRa(R) Technology Transceiver Module, 2.1 to 3.6 V, -40 to 85 degC, 47-Pin SMD, RoHS, Tray", Manufacturer=Microchip, Package Description="47-Pin Surface Mount Device, Body 26.67 x 17.78 mm, Pitch 1.27 mm", Package Reference=MODULE-47, Datasheet URL=http://www.microchip.com/mymicrochip/filehandler.aspx?ddocname=en574289, Datasheet Version="Rev. C, 04/2017", Manufacturer URL=http://www.microchip.com/, Mounting Technology=SurfaceMount, RoHSCompliant=false
U4: library part CMP-2000-06663-1, "Input Common-Mode, High-Precision, Low-Power Current-Sense Amplifier, 3 KHz, 2 nA, 1.7 to 5.5 V, -40 to 125 degC, 6-Pin SOT23 (U6+1), RoHS, Tape and Reel", Current - Input Bias=2nA, Current - Supply=21µA, Manufacturer=Maxim, Operating Temperature=-40°C~125°C, Package / Case=SOT-6, Package Description="6-Pin Small Outline Transistor, Body 2.9 x 1.625 mm, Pitch 0.95 mm", Package Reference=U6+1, Standard Package=2,500, Supplier Device Package=6-SOT, Voltage - Input Offset=2µV, Voltage - Supply, Single/Dual (±)=1.7V~5.5V, -3db Bandwidth=3kHz, Amplifier Type=CurrentSense, Category=IntegratedCircuits(ICs), Datasheet URL=https://datasheets.maximintegrated.com/en/ds/MAX44284.pdf, Datasheet Version="Rev. 4, 01/2015", Family=Linear-Amplifiers-Instrumentation,OPAmps,BufferAmps, Manufacturer URL=http://www.maximintegrated.com/, Mounting Technology=SurfaceMount, Mounting Type=SurfaceMount, Number of Circuits=1, Package URL=http://pdfserv.maximintegrated.com/package_dwgs/21-0058.PDF, Packaging=Tape&Reel(TR)
U5: "- RF Receiver BeiDou, Galileo, GLONASS, GNSS, GPS 1.575GHz -163dBm 18-LCC _9.7x10.1_", Package="SMD-18 STMicroelectronics", Availability=Unavailable, MF=STMicroelectronics, MP=TESEO-LIV3F, Price=None, SnapEDA_Link=https://www.snapeda.com/parts/TESEO-LIV3F/STMicroelectronics/view-part/1474256/?ref=snap
U6: library part CMP-0321-00481-2, "800 mA, Single-Input, Single Cell Li-Ion Solar Battery Charger, 3.5 V, -40 to 85 degC, 10-pin WSON (DQC), Green (RoHS & no Sb/Br)", Manufacturer="Texas Instruments", Over Voltage Protection=N, ComponentLink1Description=Datasheet, ComponentLink1URL=http://www.ti.com/general/docs/lit/getliterature.tsp?genericPartNumber=BQ24210&fileType=pdf, DatasheetVersion=SLUSA76A, Eco-Plan="Green (RoHS & no Sb/Br)", Lead Acid=N, Li-Ion=N, Li-Polymer=N, Mounting Technology="Surface Mount", NiCd=N, NiMH=N, PackageDescription="10-Pin Plastic Small Outline No-Lead, 2 x 3 x 0.8 mm Body, 0.5 mm Pitch, Exposed Pad", PackageReference=DQC0010A, PackageVersion="revA, Jul-2008", PartNumber=BQ24210DQCT, SubFamily="Battery Charge Management", Vin(Min)(V)=3.5
U7: library part CMP-2000-07532-1, "World’s Lowest Power 9-Axis MEMS MotionTracking(TM) Device, 1.71 to 3.6 V, -40 to 85 degC, 24-Pin QFN, RoHS, Tape and Reel", Manufacturer=TDK, Package Description="24-Pin Quad Flat No-lead Package, Body 3 x 3 mm, Pitch 0.4 mm", Package Reference=QFN-24, Datasheet URL=https://www.invensense.com/wp-content/uploads/2016/06/DS-000189-ICM-20948-v1.3.pdf, Datasheet Version="Rev. 1.3, 06/2017", Manufacturer URL=http://www.tdk.com/, Mounting Technology=SurfaceMount
U8: library part CMP-0132-00083-1, "Low Noise, Positive-Regulated Charge Pump, 1MHz, Fixed Output, 8-Pin MSOP, Industrial Temperature, Tape and Reel", DatasheetVersion="revA, Nov-2002", PackageDescription="8-Lead Plastic Micro Small Outline Package (MS) [MSOP]", PackageReference=MSOP-MS8, PackageVersion="revBB, Aug-2009"
Y1: "Crystal 32.768kHz, SMD, 3.2mm x 1.5mm, 9pF, 10 ppm"

## Via types
v1: diameter 0.6, hole 0.3, Top Layer to Bottom Layer, 16 vias
v2: diameter 0.5, hole 0.2, Top Layer to Bottom Layer, 7 vias

## Nets (pads, with @x,y where several pads share a name; then routed paths per layer and width w, separated by ;. In a path a pad name is that pad's centre, name@x,y a point inside that pad or via, vN(x,y) a via of type N, cw(c..) or ccw(c..) an arc to the next point about the centre after c; other vN are vias at no path point)
GND: B.2 btn3.3 btn3.4 C1.1 C2.1 C3.1 C4.1 C5.1 C6.2 C7.2 C8.2 C9.2 C11.1 C12.1 C13.1 C14.1 C15.1 C16.1 C17.2 C18.2 C19.1 C20.1 C21.2 C22.1 C23.2 C24.1 J1.2 J1.10 J2.5 J2.6 J2.7 J2.8 J2.9 J2.10 J2.11 J3.4 J3.5 J3.6 MCU1.6 MCU1.28 P1.2 R7.2 R10.2 R12.2 R15.2 R16.2 R17.2 R20.2 R21.2 R22.2 R23.2 R24.2 RT1.1 SMT1.P$2 SMT1.P$3 SMT2.P$2 SMT2.P$3 SMT3.P$2 SMT3.P$3 T.2 U1.4 U1.9 U1.11 U2.4 U3.1 U3.8 U3.11 U3.20 U3.21 U3.22 U3.24 U3.26 U3.27 U3.28 U3.33 U3.41 U3.47 U4.2 U5.1 U5.10 U5.12 U6.3 U6.11 U7.11 U7.18 U8.4 U8.8 | length 0
  other v1: 39,32 48.6,32
  other v2: 43.85,31.584 43.85,32.416 51.9,39.05 52.9,39.05 52.4,39.8 51.9,40.55 52.9,40.55
GPIO1: MCU1.13 T.1
GPIO2: btn2.3 btn2.4 MCU1.17
GPIO3: btn1.3 btn1.4 MCU1.18
GPIO4: MCU1.14 U5.5
LED1: D4.1 MCU1.40
LED2: D5.1 MCU1.41
LED3: D6.1 MCU1.42
MISO0: MCU1.2 U2.2
MOSI0: MCU1.1 U2.5
NetC2_2: C2.2 U7.10 | length 2.7
  Top Layer w0.2: 100.4,77.8 U7.10
  Top Layer w0.25: C2.2 100.3,76.663 100.4,76.762 100.4,77.8
NetC5_2: C5.2 R11.2 R12.1 U7.8 U7.22 | length 7.8
  Top Layer w0.2: v1(99.6,76.8) U7.8 ; U7.22 100,81.7
  Top Layer w0.25: 100,81.7 C5.2
  Bottom Layer w0.2: R11.2 99.55,75.25 99.55,76.75 v1(99.6,76.8)
  Bottom Layer w0.25: R12.1 R11.2
NetC6_1: C6.1 D3.1 R2.1 R5.1 U4.3 U6.1 | length 9
  Top Layer w0.25: C6.1 U6.1 ; U4.3 73.785,42.85 74.533,42.102 74.533,41.567 v1(74.6,41.5) 74.544,41.444 R2.1
  Bottom Layer w0.25: v1(74.6,41.5) 74.6,43.8 R5.1
NetC9_1: C9.1 J3.1 U8.2
NetC10_1: C10.1 U8.5
NetC10_2: C10.2 U8.6
NetC11_2: C11.2 L1.2 MCU1.27
NetC12_2: C12.2 MCU1.29
NetC13_2: C13.2 L3.1 U5.6 U5.7 U5.8 | length 8
  Top Layer w0.25: L3.1 C13.2 52,66.3 U5.8
  Top Layer w0.6: U5.6 U5.7 U5.8
NetC14_2: C14.2 L3.2 | length 1.4
  Top Layer w0.25: L3.2 51.2,60.4 C14.2
NetC16_2: C16.2 U1.1 | length 3.4
  Top Layer w0.25: C16.2 48.2,40.8 U1.1
NetD1_1: D1.1 R3.1 | length 2.9
  Top Layer w0.25: D1.1 51.05,27.65 v1(51.1,27.7)
  Bottom Layer w0.25: v1(51.1,27.7) 51.15,27.75 51.15,29.3 R3.1
NetD1_2: D1.2 U6.8 | length 6.2
  Top Layer w0.25: U6.8 45.9,32 46.8,31.1 48.1,31.1 D1.2
NetD2_1: D2.1 R4.1 | length 2.5
  Top Layer w0.25: v1(46.4,27.6) 46.45,27.65 D2.1
  Bottom Layer w0.25: v1(46.4,27.6) 46.45,27.65 46.45,28.7 R4.1
NetD3_2: D3.2 J2.1 | length 5.7
  Top Layer w0.34: J2.1 66.192,30.692 67.365,31.865 D3.2
NetD4_2: D4.2 R15.1
NetD5_2: D5.2 R16.1
NetD6_2: D6.2 R17.1
NetJ1_1: J1.1 MCU1.21
NetJ1_3: J1.3 MCU1.23
NetJ1_5: J1.5 MCU1.22
NetJ1_9: J1.9 MCU1.24
NetJ4_1: J4.1 MCU1.33
NetJ4_2: J4.2 MCU1.32
NetJ4_3: J4.3 MCU1.31
NetJ4_4: J4.4 MCU1.30
NetJ5_1: J5.1 MCU1.15
NetJ5_2: J5.2 MCU1.16
NetL2_2: L2.2 U1.3 | length 6.3
  Top Layer w0.25: v1(49,40) 49.095,40 49.295,39.8 U1.3
  Bottom Layer w0.25: L2.2 48.67,40.33 v1(49,40)
NetMCU1_36: MCU1.36 R18.2 R20.1
NetMCU1_37: MCU1.37 R19.2 R21.1
NetR5_2: R5.2 R6.1 | length 3.9
  Bottom Layer w0.25: R5.2 R6.1
NetR6_2: R6.2 T.3 | length 3
  Bottom Layer w0.25: R6.2 87.95,44 T.3
NetR7_1: R7.1 U6.2 | length 6.9
  Top Layer w0.25: v1(40.8,32.3) 41,32.5 U6.2
  Bottom Layer w0.25: R7.1 39.9,30.5 40.8,31.4 v1(40.8,32.3)
NetR8_2: R8.2 R10.1 U1.7 | length 14.7
  Top Layer w0.25: U1.7 v1(55.8,39.3)
  Bottom Layer w0.25: R8.2 54.3,37.8 v1(55.8,39.3) 55.85,39.25 57.05,39.25 R10.1
NetR9_1: R9.1 U6.4 | length 3.9
  Top Layer w0.25: R9.1 42.2,31.049 42.561,31.41 42.685,31.41 42.775,31.5 U6.4
NetR9_2: R9.2 RT1.2 U6.5 | length 19
  Top Layer w0.25: v1(41.9,33.8) 41.9,43.1 RT1.2 ; U6.5 v1(42.9,29.6) 42.9,29.505 43.2,29.205 R9.2
  Bottom Layer w0.25: v1(41.9,33.8) 41.9,30.6 v1(42.9,29.6)
NetR22_1: R22.1 U7.7 | length 4.1
  Top Layer w0.2: 99.2,77.621 U7.7
  Top Layer w0.25: v1(97.4,77.4) 98.954,77.4 99.175,77.621
  Bottom Layer w0.25: R22.1 96.15,78.4 97.15,77.4 v1(97.4,77.4)
NetR23_1: R23.1 U7.21 | length 0.3
  Top Layer w0.2: U7.21 U7.21@100.4,81.6
NetR24_1: R24.1 U8.1
NetSMT2_P$1: SMT2.P$1 U5.11 | length 8
  Top Layer w0.75: U5.11 51.9,83.475 SMT2.P$1
P\G\: D2.2 U6.6 U6.7 | length 4.1
  Top Layer w0.25: U6.7 U6.6 46,31 D2.2
RFH: SMT1.P$1 U3.23 | length 11
  Top Layer w0.75: U3.23@77.07,79.56 cw(c79.07,79.56) 79.07,81.56 83.8,81.56 ccw(c83.8,83.56) SMT1.P$1@85.8,83.56
RFL: SMT3.P$1 U3.25 | length 11
  Top Layer w0.75: SMT3.P$1@65.8,83.56 ccw(c67.8,83.56) 67.8,81.56 72.53,81.56 cw(c72.53,79.56) U3.25@74.53,79.56
RST: btn3.1 btn3.2 C15.2 J1.6 MCU1.4 R1.1 U3.32
RX0: MCU1.9 U3.7
RX1: C23.1 MCU1.11 U5.3 | length 4.5
  Top Layer w0.25: U5.3 46.5,66.3 C23.1
SCK0: MCU1.3 MCU1.39 U2.6
SCL: MCU1.19 R13.2 U7.23 | length 3.1
  Top Layer w0.2: U7.23 U7.23@99.6,81.6
  Top Layer w0.25: v1(99.2,82.7) 99.2,82.605 99.357,82.449 99.357,82.402 99.59,82.169 99.59,81.6
  Bottom Layer w0.25: R13.2 98.8,83.195 99.2,82.795 v1(99.2,82.7)
SDA: MCU1.20 R14.2 U7.24 | length 3.7
  Top Layer w0.2: U7.24 U7.24@99.2,81.6
  Top Layer w0.25: v1(97.9,82.3) 98.7,82.3 99.18,81.82 99.18,81.6
  Bottom Layer w0.25: R14.2 97.1,83.1 v1(97.9,82.3)
SS0: MCU1.44 U2.1
TOSC1: C1.2 MCU1.25 Y1.1
TOSC2: C3.2 MCU1.26 Y1.2
TX0: MCU1.10 U3.6
TX1: C24.2 MCU1.12 U5.2 | length 4.6
  Top Layer w0.25: C24.2 45.3,62.2 U5.2
Vbat: B.1 C7.1 C8.1 C18.1 L2.1 R3.2 R4.2 R8.1 R19.1 U1.5 U1.6 U1.8 U6.10 U8.3 U8.7 | length 33.6
  Top Layer w0.25: U6.10 C7.1 ; v1(46.6,38.9) C18.1 ; v1(47.6,40) 47.65,39.95 47.65,38.95 C18.1 ; U1.5 49.282,38.8 49.183,38.9 C18.1
  Top Layer w1.5: B.1@30.734,27.741 30.705,27.741 29.859,28.587 29.859,30.584 28.194,32.249 28.194,35.361 B.1@33.274,35.361
  Bottom Layer w0.25: R8.1 45.05,38.85 46.55,38.85 v1(46.6,38.9) ; L2.1 46.13,41.47 v1(47.6,40) ; R4.2 47.1,30.25 R3.2
VCC: btn1.1 btn1.2 btn2.1 btn2.2 C4.2 C17.1 C19.2 C20.2 C21.1 C22.2 J1.4 L1.1 MCU1.5 R1.2 R11.1 R13.1 R14.1 U1.2 U1.10 U2.3 U2.7 U2.8 U3.12 U3.34 U4.1 U4.6 U7.13 | length 10.4
  Top Layer w0.2: U7.13 102.2,78.7
  Top Layer w0.25: U1.10 53.89,40.815 56.715,40.815 C17.1 ; U4.1 U4.6 ; 102.2,78.7 C4.2
  Bottom Layer w0.25: R14.1 97.187,84.687 97.775,84.687 98.088,85 R13.1
Vcurr: MCU1.35 U4.5
Vpanel: P1.1 R2.2 R18.1 U4.4 | length 4.8
  Top Layer w0.25: R2.2 75.551,39.251 75.9,39.6 75.9,42.75 U4.4
pads on no net: J1.7 J1.8 J2.2 J2.3 J2.4 J3.2 J3.3 MCU1.7 MCU1.8 MCU1.34 MCU1.38 MCU1.43 U3.2 U3.3 U3.4 U3.5 U3.9 U3.10 U3.13 U3.14 U3.15 U3.16 U3.17 U3.18 U3.19 U3.29 U3.30 U3.31 U3.35 U3.36 U3.37 U3.38 U3.39 U3.40 U3.42 U3.43 U3.44 U3.45 U3.46 U5.4 U5.9 U5.13 U5.14 U5.15 U5.16 U5.17 U5.18 U6.9 U7.1 U7.2 U7.3 U7.4 U7.5 U7.6 U7.9 U7.12 U7.14 U7.15 U7.16 U7.17 U7.19 U7.20 U7.25

## Text inside footprints (layer, text, board x,y; h text height)
J2: Top 3D Body "PCB EDGE" at 60.292,25.341 h0.3